# EAGLE board atmega328_programmer (EAGLE 7.5.0)
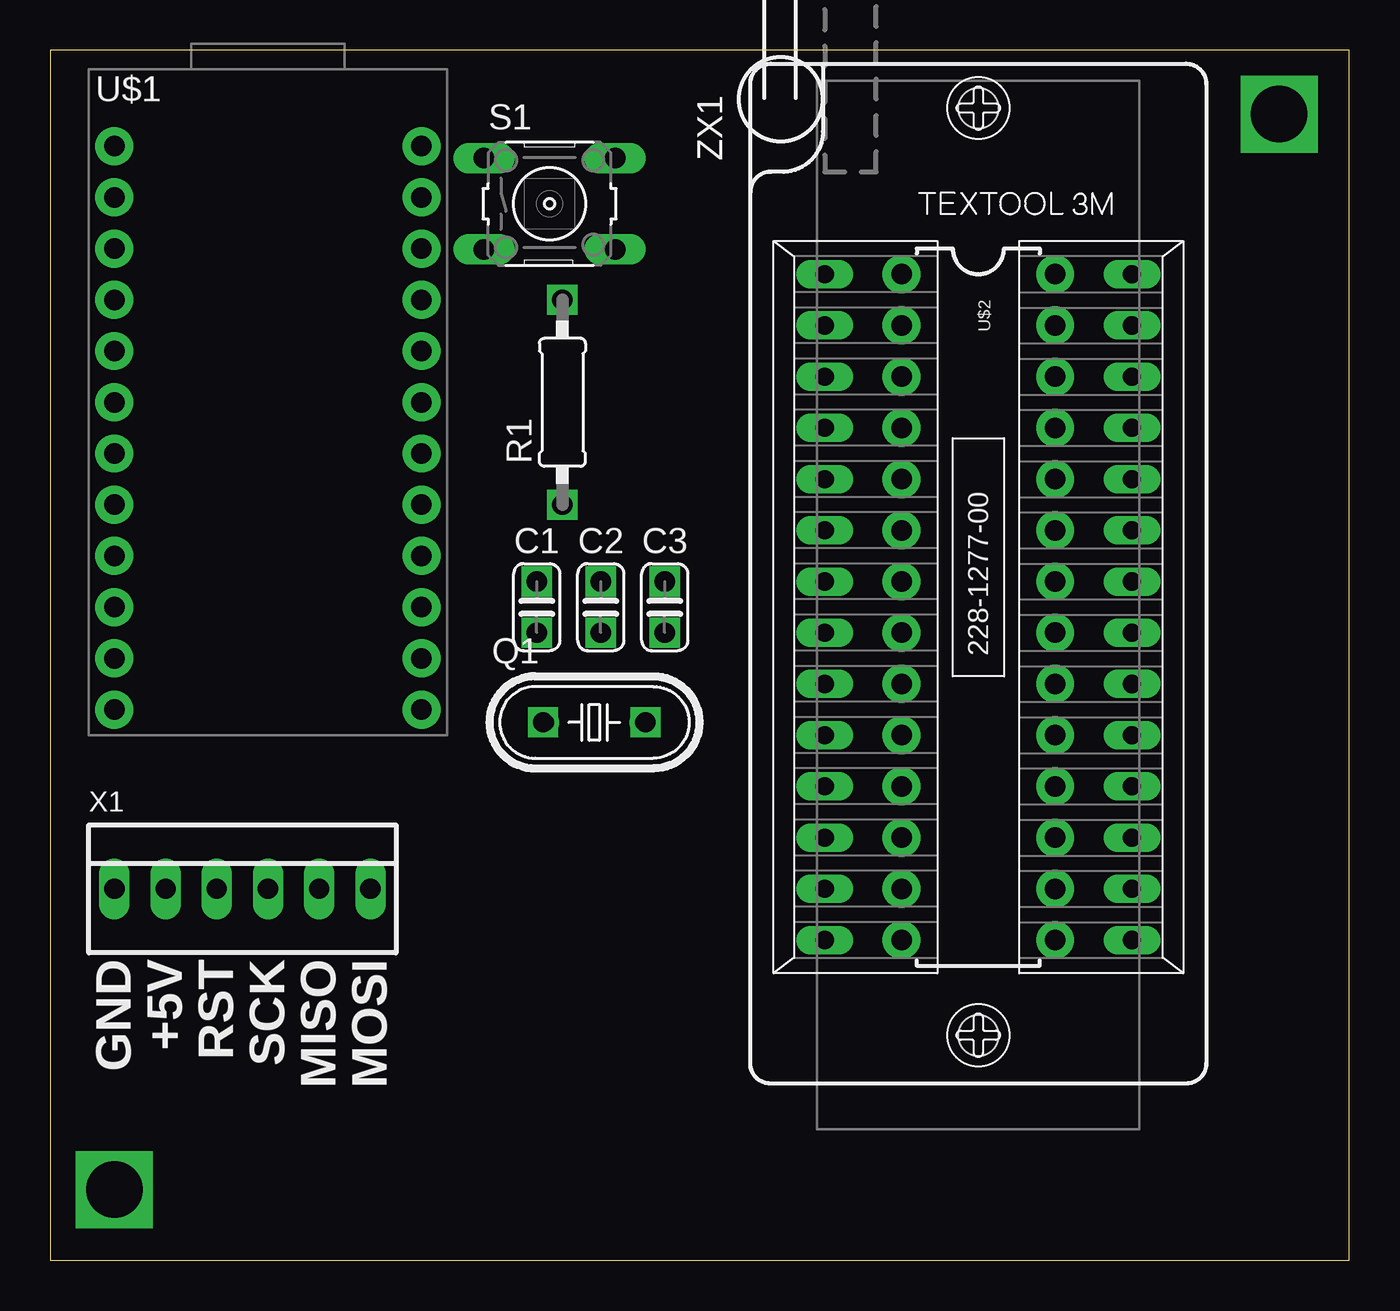
[diagram p0: board, top side]
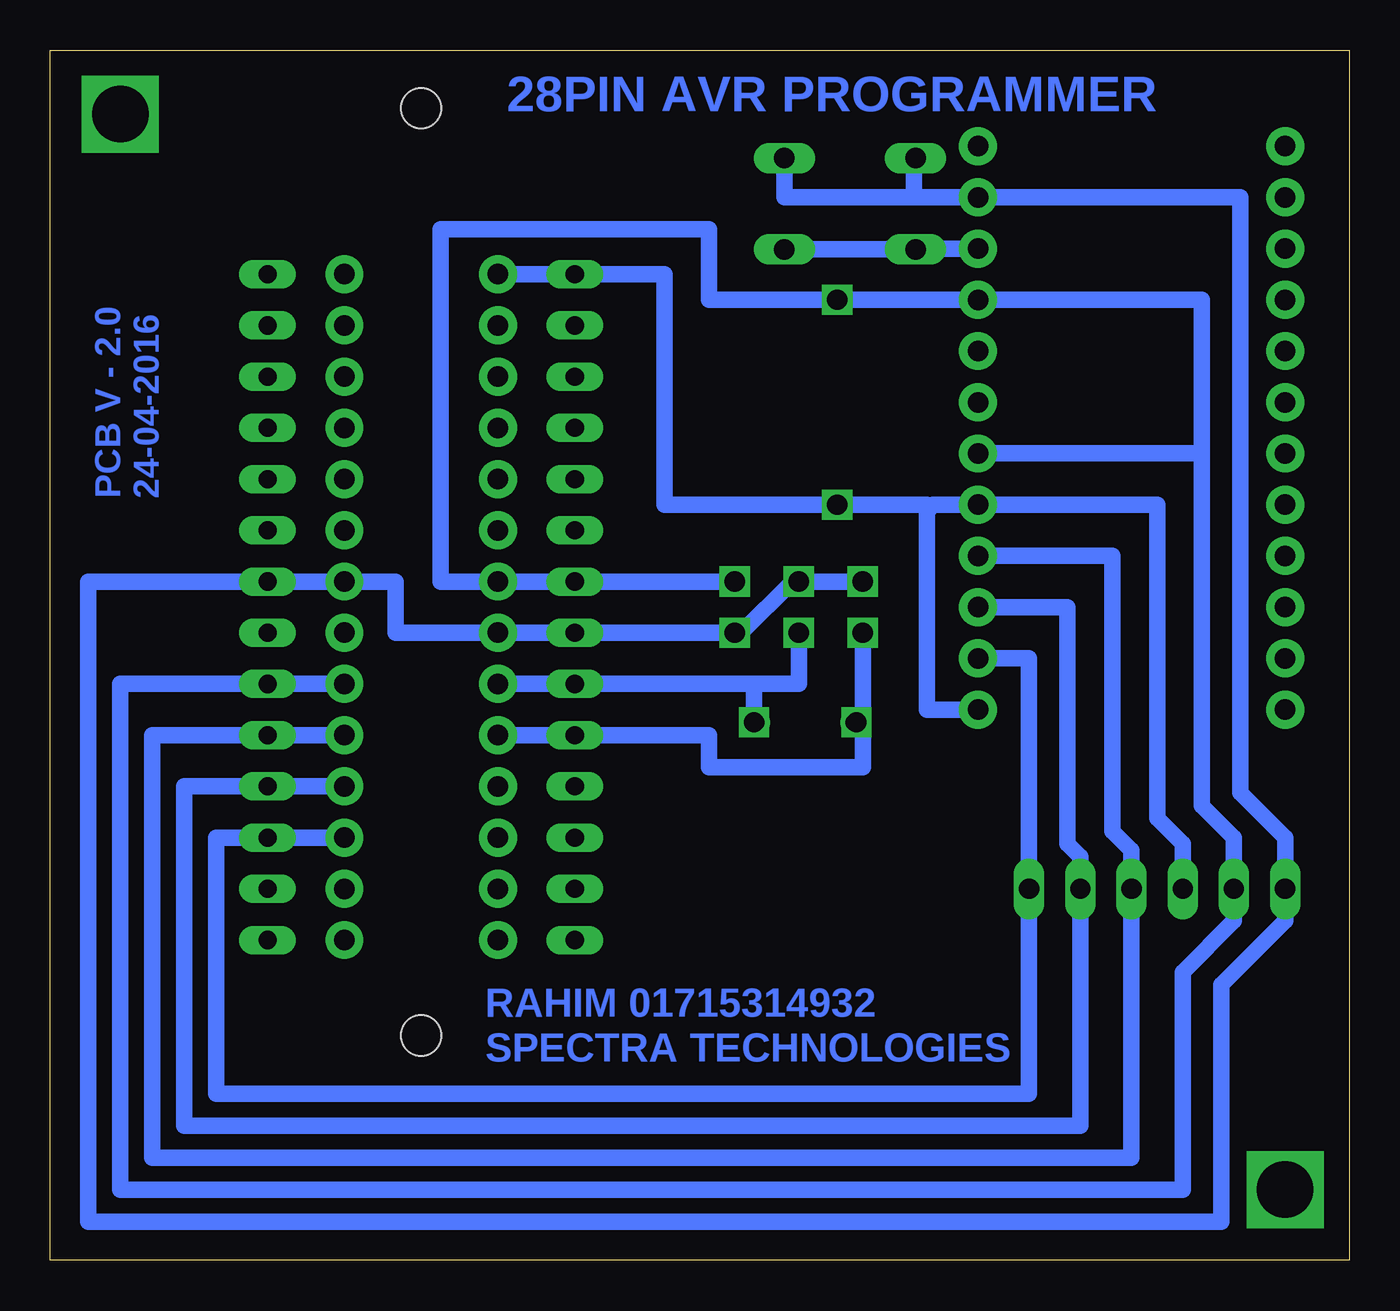
[diagram p1: board, bottom side, seen from below]

Size 64.43 x 59.99 mm. Coordinates in mm from the lower left corner, seen from the top.
Outline: 0,0 64.43,0 64.43,59.99 0,59.99 0,0
Copper layers (1*16): Top 0.035mm / dielectric 1.5mm / Bottom 0.035mm
Design rules "default": minimum track width 10mil, minimum drill 24mil, track to track 8mil, track to pad 8mil, pad to pad 8mil, via to via 8mil, smd to smd 8mil, copper to edge 40mil, drill to drill 8mil, minimum pad ring 10mil, minimum via ring 8mil, stop-mask expansion 4mil, vias tented up to drill 0mil, thermal gap 10mil

## Footprints (pad centres in the part's own frame; a part is rotated, then mirrored left to right if it is on the bottom)
C025-024X044 = drill 0.813 octagon: 1 -1.27,0; 2 1.27,0
HC49U-V = drill 0.813: 1 -2.413,0; 2 2.413,0
0207/10 = drill 0.813 octagon: 1 -5.08,0; 2 5.08,0
B3F-10XX = drill 1.016 long: 1 -3.251,2.261; 2 3.251,2.261; 3 -3.251,-2.261; 4 3.251,-2.261
ARDUINO_PRO_MICRO = drill 1.016 pad 1.88: 1 -7.62,12.7; 2 -7.62,10.16; 3 -7.62,7.62; 4 -7.62,5.08; 5 -7.62,2.54; 6 -7.62,0; 7 -7.62,-2.54; 8 -7.62,-5.08; 9 -7.62,-7.62; 10 -7.62,-10.16; 11 -7.62,-12.7; 12 -7.62,-15.24; 13 7.62,-15.24; 14 7.62,-12.7; 15 7.62,-10.16; 16 7.62,-7.62; 17 7.62,-5.08; 18 7.62,-2.54; 19 7.62,0; 20 7.62,2.54; 21 7.62,5.08; 22 7.62,7.62; 23 7.62,10.16; 24 7.62,12.7
DIL28-3-ZIF_SOCKET = drill 1.016 pad 1.88: 1 -16.51,-3.81; 2 -13.97,-3.81; 3 -11.43,-3.81; 4 -8.89,-3.81; 5 -6.35,-3.81; 6 -3.81,-3.81; 7 -1.27,-3.81; 8 1.27,-3.81; 9 3.81,-3.81; 10 6.35,-3.81; 11 8.89,-3.81; 12 11.43,-3.81; 13 13.97,-3.81; 14 16.51,-3.81; 15 16.51,3.81; 16 13.97,3.81; 17 11.43,3.81; 18 8.89,3.81; 19 6.35,3.81; 20 3.81,3.81; 21 1.27,3.81; 22 -1.27,3.81; 23 -3.81,3.81; 24 -6.35,3.81; 25 -8.89,3.81; 26 -11.43,3.81; 27 -13.97,3.81; 28 -16.51,3.81
22-23-2061 = drill 1 long: 1 -6.35,0; 2 -3.81,0; 3 -1.27,0; 4 1.27,0; 5 3.81,0; 6 6.35,0
228-1277-00-0602J = drill 0.9 long: 1 -16.51,-7.62; 2 -13.97,-7.62; 3 -11.43,-7.62; 4 -8.89,-7.62; 5 -6.35,-7.62; 6 -3.81,-7.62; 7 -1.27,-7.62; 8 1.27,-7.62; 9 3.81,-7.62; 10 6.35,-7.62; 11 8.89,-7.62; 12 11.43,-7.62; 13 13.97,-7.62; 14 16.51,-7.62; 15 16.51,7.62; 16 13.97,7.62; 17 11.43,7.62; 18 8.89,7.62; 19 6.35,7.62; 20 3.81,7.62; 21 1.27,7.62; 22 -1.27,7.62; 23 -3.81,7.62; 24 -6.35,7.62; 25 -8.89,7.62; 26 -11.43,7.62; 27 -13.97,7.62; 28 -16.51,7.62 | hole 2: 21.24,0; -24.74,0

## Placement (x,y rotation side)
C1  [C025-024X044]  24.13,32.38 270 top
C2  [C025-024X044]  27.3,32.38 270 top
C3  [C025-024X044]  30.48,32.38 270 top
Q1  [HC49U-V]  26.99,26.67 0 top
R1  [0207/10]  25.4,42.54 90 top
S1  [B3F-10XX]  24.77,52.39 0 top
U$1  ARDUINO_PRO_MICRO  [ARDUINO_PRO_MICRO]  10.79,42.54 0 top
U$2  ZIFSOCKET-28-3ZIFFSOCKET-28-3  [DIL28-3-ZIF_SOCKET]  46.04,32.38 270 top
X1  [22-23-2061]  9.53,18.41 0 top
ZX1  228-1277-00-0602J  [228-1277-00-0602J]  46.04,32.38 270 top

## Library data of the parts
C1-C3 R1 = rcl
Q1 = crystal; OC_FARNELL: 1666969; OC_NEWARK: unknown
S1 = switch-omron; MPN: B3F-1000; OC_FARNELL: 176432; OC_NEWARK: 36M3542
U$1 = SparkFun-Boards
U$2 = SparkFun-Connectors
X1 = con-molex; MF: MOLEX; MPN: 22-23-2061; OC_FARNELL: 1462922; OC_NEWARK: 27C1933
ZX1 = con-3m; MF: 3M; MPN: 228-1277-00-0602J; OC_FARNELL: 9897356; OC_NEWARK: 85K7825

## Nets
+5V: C3.1 R1.2 U$1.18 U$1.21 U$2.7 U$2.20 X1.2 ZX1.7 ZX1.20
GND: C1.1 C2.1 C3.2 S1.1 S1.2 U$1.23 U$2.8 U$2.22 X1.1 ZX1.8 ZX1.22
MISO: U$1.15 U$2.18 X1.5 ZX1.18
MOSI: U$1.14 U$2.17 X1.6 ZX1.17
N$1: U$2.28
N$2: U$2.27
N$3: U$2.26
N$4: U$2.25
N$5: U$2.24
N$6: U$2.23
N$7: U$1.1
N$8: U$2.21
N$9: U$1.2
N$10: U$1.3
N$11: U$1.4
N$12: U$1.5
N$13: U$2.16
N$14: U$2.15
N$15: U$1.6
N$16: U$2.2
N$17: U$2.3
N$18: U$2.4
N$19: U$2.5
N$20: U$2.6
N$22: U$1.7
N$23: U$1.8
N$24: C1.2 Q1.1 U$2.10 ZX1.10
N$25: U$2.11
N$26: U$2.12
N$27: U$2.13
N$28: U$2.14
N$29: U$1.9
N$30: U$1.10
N$31: U$1.11
N$32: U$1.12
N$33: U$1.24
N$35: S1.3 S1.4 U$1.22
N$36: C2.2 Q1.2 U$2.9 ZX1.9
N$37: U$1.20
N$38: U$1.19
N$49: ZX1.2
N$50: ZX1.3
N$51: ZX1.4
N$52: ZX1.5
N$53: ZX1.6
N$58: ZX1.11
N$59: ZX1.12
N$60: ZX1.13
N$61: ZX1.14
N$62: ZX1.28
N$63: ZX1.27
N$64: ZX1.26
N$65: ZX1.25
N$66: ZX1.24
N$67: ZX1.23
N$69: ZX1.21
N$74: ZX1.16
N$75: ZX1.15
RST: R1.1 U$1.13 U$1.17 U$2.1 X1.3 ZX1.1
SCK: U$1.16 U$2.19 X1.4 ZX1.19

## Tracks (layer width: path | path; a pad name or v marks a point on that pad's centre or on a via)
+5V  (via drill 1)
  Bottom 0.813: ZX1.20 U$2.20 60.96,28.57 60.96,3.49 8.26,3.49 8.26,14.29 5.71,16.83 X1.2 5.71,20.95 7.3,22.54 7.3,40.01 | C3.1 ZX1.7 U$2.7 45.09,33.65 45.09,51.12 31.75,51.12 31.75,47.62 R1.2 | U$1.21 R1.2 | R1.2 7.3,47.62 7.3,40.01 | U$1.18 7.3,40.01
  other vias: 30.48,33.65 25.4,47.62
GND  (via drill 1)
  Bottom 0.813: C1.1 C2.1 27.62,33.65 30.16,31.12 C3.2 ZX1.8 U$2.8 47.31,31.12 47.31,33.65 U$2.22 | U$2.22 ZX1.22 | 21.59,52.7 U$1.23 5.4,52.7 5.4,23.18 3.17,20.95 X1.1 3.17,16.83 6.35,13.65 6.35,1.9 62.55,1.9 62.55,33.65 U$2.22 | 21.59,52.7 28.02,52.7 S1.2 | S1.1 21.59,54.65 21.59,52.7
  other vias: 24.13,33.65 27.3,33.65 30.48,31.12
MISO
  Bottom 0.813: ZX1.18 U$2.18 57.78,23.49 57.78,6.67 13.34,6.67 X1.5 13.34,20 13.97,20.64 13.97,32.38 U$1.15
MOSI
  Bottom 0.813: ZX1.17 U$2.17 56.2,20.95 56.2,8.25 15.88,8.25 X1.6 15.88,29.84 U$1.14
N$24
  Bottom 0.813: U$2.10 ZX1.10 31.75,26.04 31.75,24.45 24.13,24.45 24.13,26.67 | 24.13,26.67 C1.2 | Q1.1 24.13,26.67
N$34  (via drill 2.8)
  other vias: 3.17,3.49
N$35
  Bottom 0.813: U$1.22 21.51,50.16 S1.3 S1.4
N$36
  Bottom 0.813: U$2.9 ZX1.9 29.53,28.57 | 29.53,28.57 27.3,28.57 C2.2 | Q1.2 29.53,26.67 29.53,28.57
N$40  (via drill 2.8)
  other vias: 60.96,56.83
N$41  (via drill 1)
  other vias: 24.13,31.12
N$42  (via drill 1)
  other vias: 27.3,31.12
N$47  (via drill 1)
  other vias: 29.53,26.67
N$48  (via drill 1)
  other vias: 24.45,26.67
RST  (via drill 1)
  Bottom 0.813: U$1.13 20.95,27.3 20.95,37.15 | 20.95,37.15 20.95,37.46 R1.1 33.97,37.46 33.97,48.9 ZX1.1 U$2.1 | 20.95,37.15 20.64,37.46 U$1.17 9.53,37.46 9.53,21.91 8.26,20.64 X1.3
  other vias: 25.4,37.46
SCK
  Bottom 0.813: ZX1.19 U$2.19 59.37,26.04 59.37,5.08 10.79,5.08 X1.4 10.79,20.32 11.75,21.27 11.75,34.93 U$1.16

## Text on the board
Bottom: 28PIN AVR PROGRAMMER | PCB V - 2.0 / 24-04-2016 | RAHIM 01715314932 | SPECTRA TECHNOLOGIES
tPlace: GND | +5V | RST | SCK | MISO | MOSI